# Altium PCB mlx-brd1_091.PcbDoc
Units mil, origin at the board's own origin, x right, y up, seen from the top; angles counter-clockwise.
Board outline 2550 x 1750 mil, 2 copper layers (Top Layer, Bottom Layer), stack 61.756 mil thick; 47 components, 33 nets, 191 pads, 79 vias.
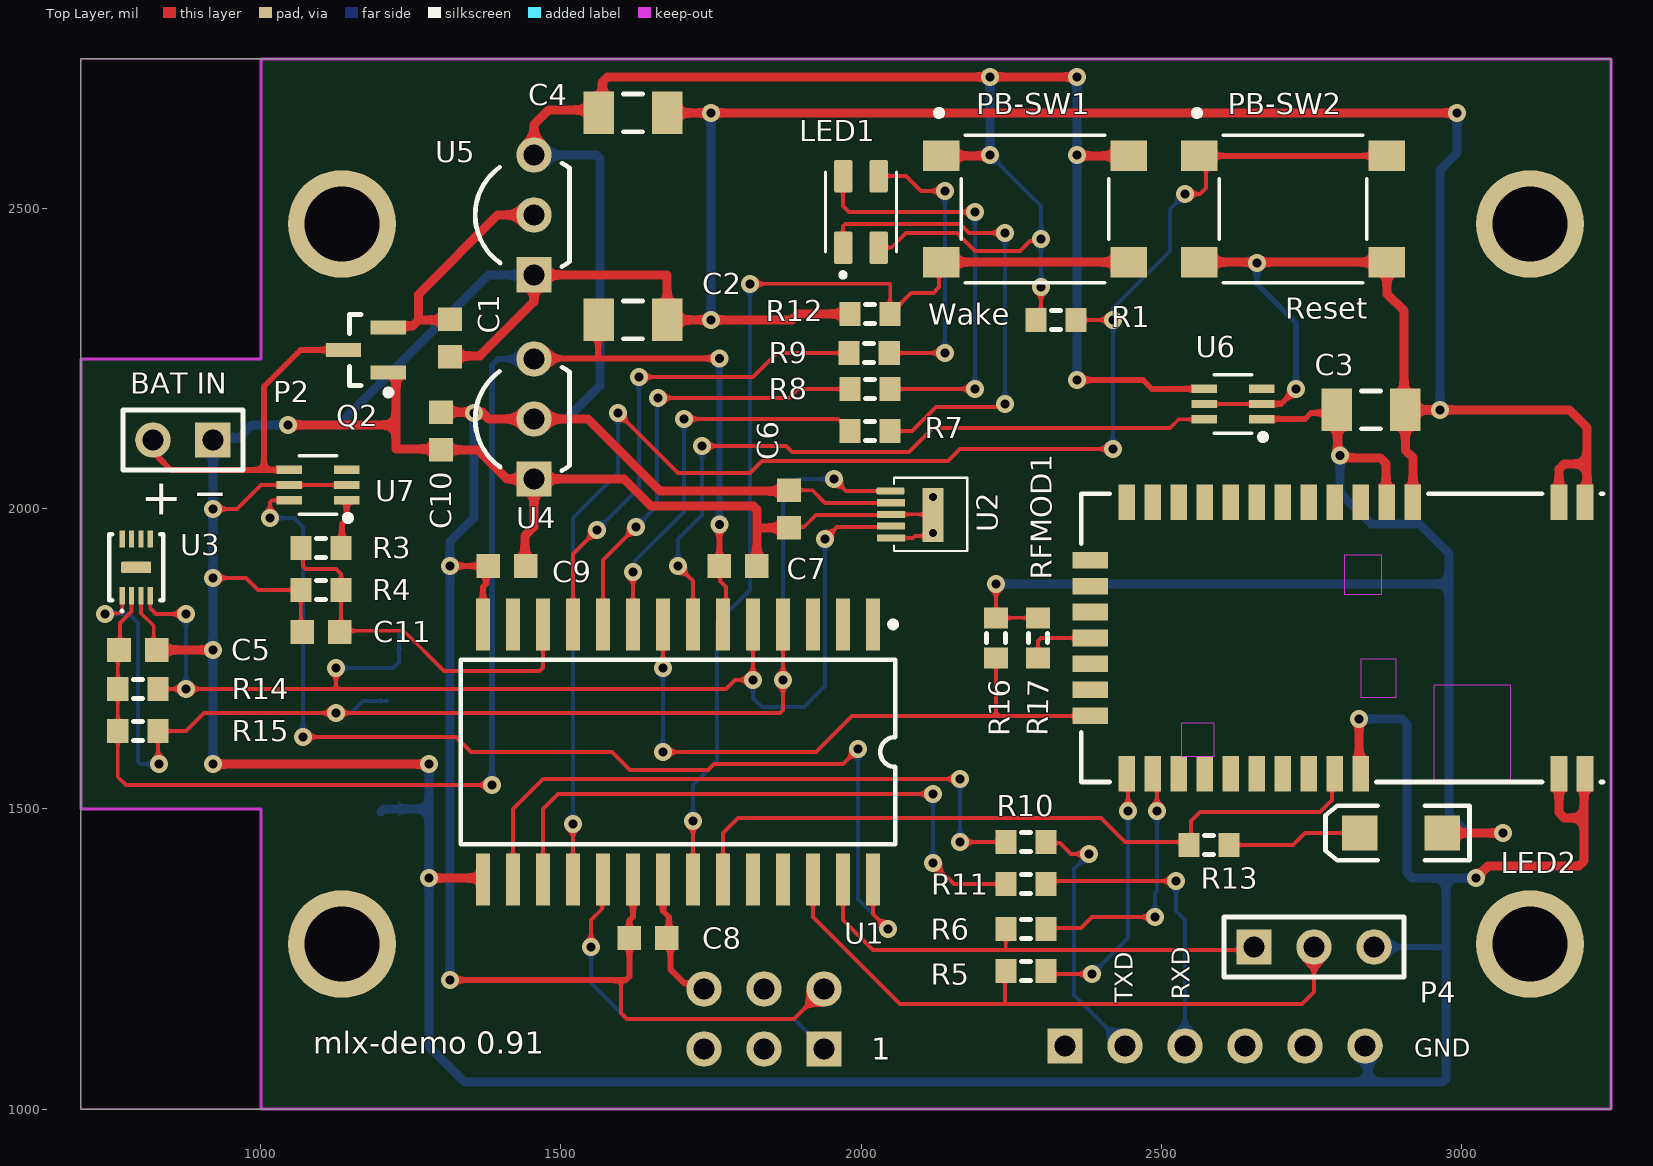
[diagram p0: Top Layer view]
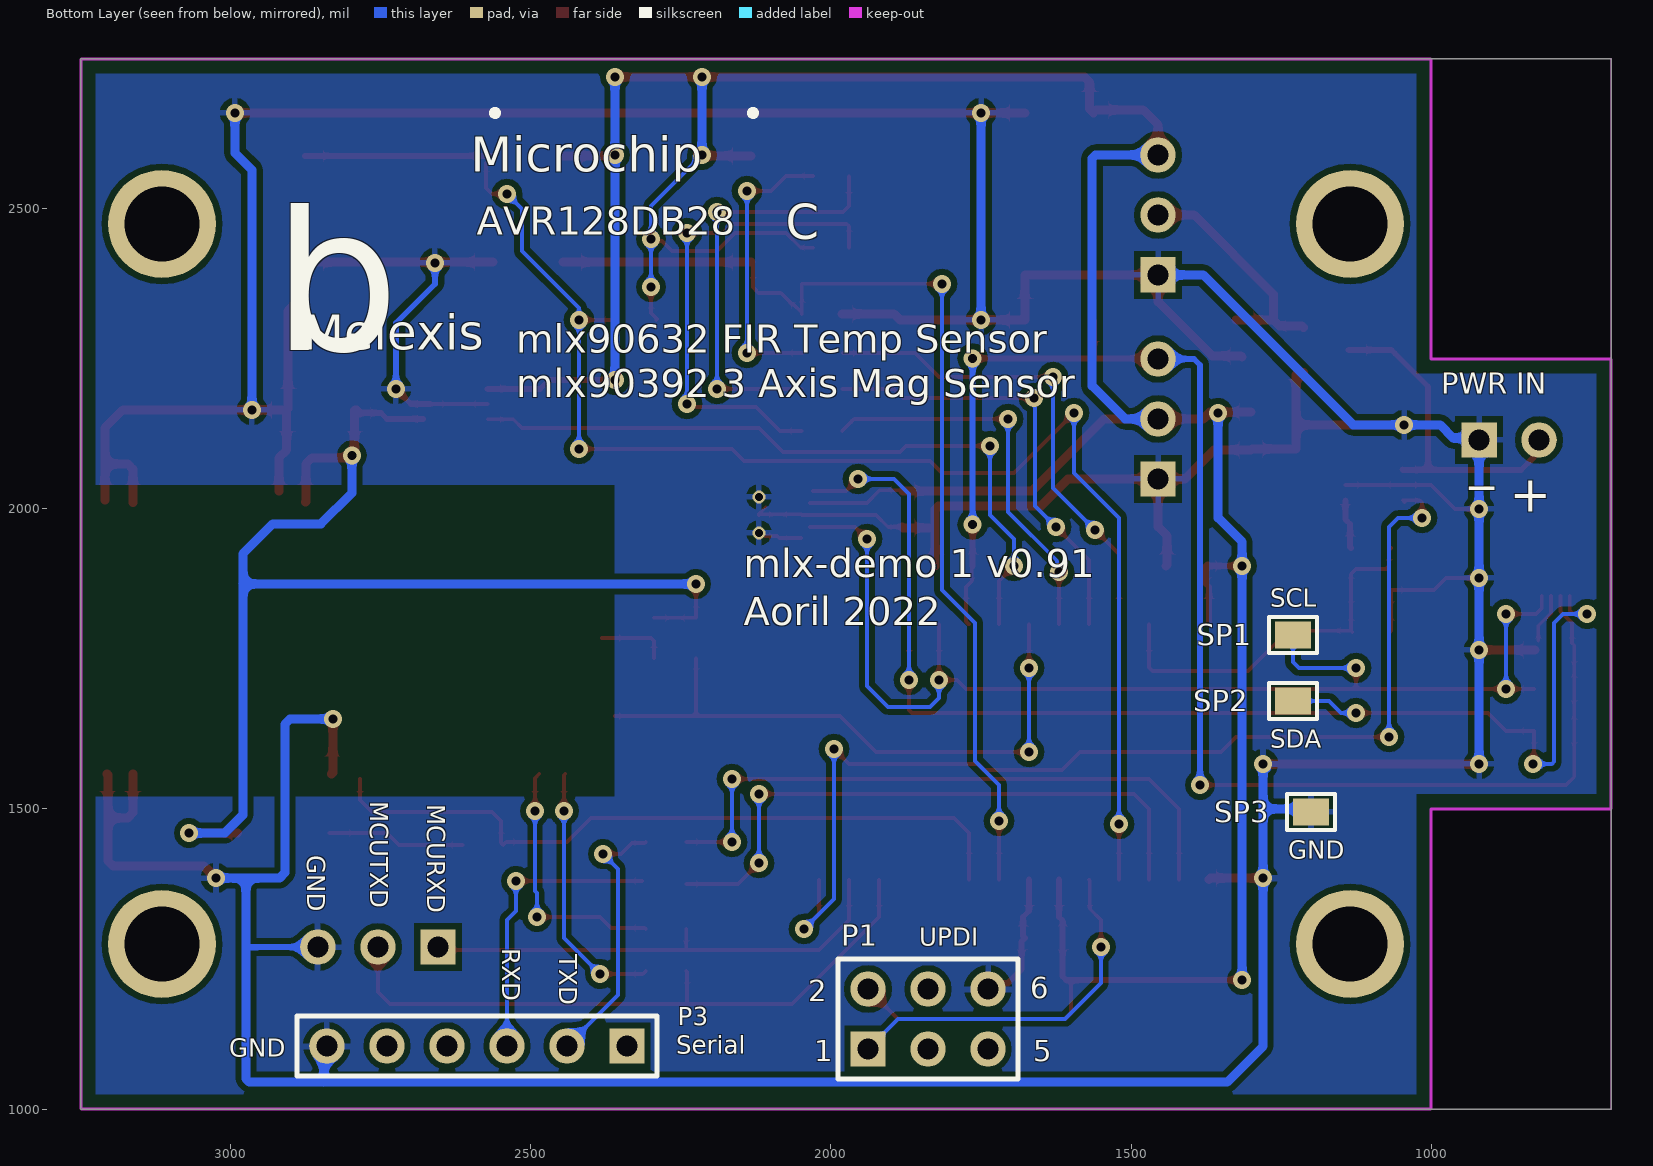
[diagram p1: Bottom Layer view, seen from below]

## Layer stack, top to bottom
Top Solder: solder mask 1, SM-001, Dk 4
Top Layer: signal copper 1.378
Dielectric 1: core 59, Core-043, Dk 4.3
Bottom Layer: signal copper 1.378
Bottom Solder: solder mask 1, SM-001, Dk 4

## Board outline
700,1000 3250,1000 3250,2750 1200,2750 700,2750 700,2250
cut-out: 700,1500 1000,1500 1000,1000 700,1000
cut-out: 700,2750 1000,2750 1000,2250 700,2250
cut-out: 700,2750

## Design rules (kind name [scope] priority, off if disabled: settings)
Clearance [All] p1: gap=6 ignorepadtopadclearanceinfootprint=FALSE except(10: Arc-Fill Arc-Poly Arc-Region Track-Fill Track-Poly Track-Region THPad-Fill THPad-Poly THPad-Region Via-Fill Via-Poly Via-Region Fill-Fill Fill-Poly Fill-Region Poly-Poly Poly-Region Region-Region)
HoleSize [All] p1: absolutevalues=TRUE maxlimit=125 minlimit=1 maxpercent=80.000 minpercent=20.000
MinimumSolderMaskSliver [All] p1: minsoldermaskwidth=0
PolygonConnect [All] p1: connectstyle=Relief reliefconductorwidth=10 reliefentries=4 polygonreliefangle="90 Angle" airgapwidth=10
RoutingVias [All] p1: holewidth=15 width=30 viastyle="Through Hole" minholewidth=15 minwidth=30 maxholewidth=28 maxwidth=50
SilkToSolderMaskClearance [IsPad] p1: minsilkscreentomaskgap=2 clearancetoexposedcopper=TRUE
SolderMaskExpansion [All] p1: expansion=4 istentingtop=FALSE
Width [All] p1: maxlimit=30 minlimit=6 preferedwidth=10 minimp=50.000000 maximp=50.000000 favimp=50.000000
27 further rules are at their usual default settings.

## Components (designator, comment, footprint, x,y, rotation, side; value= is the part's Value field where it differs from the comment)
C1 "100nF" CAPC1608N 1315,2285 r90 top value="CAP CER 0.1UF 50V X7R 0603"
C2 "22uF" CAPC3216N 1620,2315 r180 top value="CAP CER 22UF 10V X5R 1206"
C3 "22uF" CAPC3216N 2850,2165 r180 top value="CAP CER 22UF 10V X5R 1206"
C4 "22uF" CAPC3216N 1620,2660 r180 top value="CAP CER 22UF 10V X5R 1206"
C5 "100nF" CAPC1608N 795,1765 r180 top value="CAP CER 0.1UF 50V X7R 0603"
C6 "100nF" CAPC1608N 1880,2000 r90 top value="CAP CER 0.1UF 50V X7R 0603"
C7 "100nF" CAPC1608N 1795,1905 r0 top value="CAP CER 0.1UF 50V X7R 0603"
C8 "100nF" CAPC1608N 1645,1285 r180 top value="CAP CER 0.1UF 50V X7R 0603"
C9 "100nF" CAPC1608N 1410,1905 r180 top value="CAP CER 0.1UF 50V X7R 0603"
C10 "100nF" CAPC1608N 1300,2130 r90 top value="CAP CER 0.1UF 50V X7R 0603"
C11 "1uF" CAPC1608N 1100,1795 r0 top value="CAP CER 1UF 10V X7R 0603"
LED1 "RGB LED" SOL150P350X210-4N 2000,2495 r90 top value="LED RGB DIFFUSED 4PLCC SMD"
LED2 "Status LED" 3.2X1.6X1.1 2900,1460 r180 top value="LED AMBER CLEAR 1206 SMD"
P1 "UDPI HDR" HDR2X3 1938.33,1100 r180 bottom value=n/a
P2 "Header 2" HDR1X2 920,2115 r180 top value=n/a
P3 "Header 6" HDR1X6 2340,1105 r0 bottom
P4 "Header 3" HDR1X3 2655,1270 r0 top
PB-SW1 "PTS645SM43SMTR92LFS" SWITCH_43SMTR92LFS 2290,2500 r0 top value="SWITCH TACTILE SPST-NO 0.05A 12V"
PB-SW2 "PTS645SM43SMTR92LFS" SWITCH_43SMTR92LFS 2720,2500 r0 top value="SWITCH TACTILE SPST-NO 0.05A 12V"
Q2 "DMP2004K" SOT23-3N 1175,2265 r180 top value="MOSFET P-CH 20V 600MA SOT23-3"
R1 "10k0" RESC1608N 2325,2315 r0 top value="RES 10K OHM 1/8W 5% CF AXIAL"
R3 "10k0" RESC1608N 1100,1935 r0 top value="RES 10K OHM 1/8W 5% CF AXIAL"
R4 "10k0" RESC1608N 1100,1865 r0 top value="RES 10K OHM 1/8W 5% CF AXIAL"
R5 "1k0" RESC1608N 2275,1230 r0 top value="RES 10K OHM 1/8W 5% CF AXIAL"
R6 "1k0" RESC1608N 2275,1300 r0 top value="RES 10K OHM 1/8W 5% CF AXIAL"
R7 "1k0" RESC1608N 2015,2130 r180 top value="RES 10K OHM 1/8W 5% CF AXIAL"
R8 "1k0" RESC1608N 2015,2200 r0 top value="RES 10K OHM 1/8W 5% CF AXIAL"
R9 "1k0" RESC1608N 2013.46,2260 r0 top value="RES 10K OHM 1/8W 5% CF AXIAL"
R10 "Res3" RESC1608N 2275,1445 r0 top value="1k0  1/8W"
R11 "Res3" RESC1608N 2275,1375 r0 top value="1k0  1/8W"
R12 "10k0" RESC1608N 2015,2325 r180 top value="RES 10K OHM 1/8W 5% CF AXIAL"
R13 "1k0" RESC1608N 2580,1440 r180 top value="RES 10K OHM 1/8W 5% CF AXIAL"
R14 "2k2" RESC1608N 795,1700 r180 top value="RES 10K OHM 1/8W 5% CF AXIAL"
R15 "2k2" RESC1608N 795,1630 r180 top value="RES 10K OHM 1/8W 5% CF AXIAL"
R16 "10k0" RESC1608N 2225,1785 r90 top value="RES 10K OHM 1/8W 5% CF AXIAL"
R17 "10k0" RESC1608N 2295,1785 r90 top value="RES 10K OHM 1/8W 5% CF AXIAL"
RFMOD1 "RN4870 BTLE MODULE" AP6-00539 2805,1785 r270 top value="RX TXRX MODULE BLE CHIP SMD"
SP1 "45x60mil solder pad" sp45x60 1230,1790 r180 bottom
SP2 "45x60mil solder pad" sp45x60 1230,1680 r180 bottom
SP3 "45x60mil solder pad" sp45x60 1200,1495 r180 bottom
U1 "AVR128DB28" AVR128DB28_SOIC28 1695,1595 r180 top value="AVR DB Microcontroller"
U2 "MLX90632" MLX90632_FIR_M2 2050,1990 r0 top value="FIR sensor"
U3 "MLX90392" UTDFN8_2.5x2x0.4V2 792.13,1902.76 r0 top value="3D Magnetometer"
U4 "MCP1702 - 1.8V" MC1702-TO92 1455,2150 r0 top value="Linear Voltage Regulator IC Positive Fixed 1 Output 250mA TO-92-3"
U5 "MCP1702 - 3.3V" MC1702-TO92 1455,2490 r0 top value="Linear Voltage Regulator IC Positive Fixed 1 Output 200mA TO-92-3"
U6 "MIC94095YC6" SC-70 2620,2175 r180 top value="Power Switch/Driver 1:1 P-Channel 1.2A SC-70-6"
U7 "MIC94095YC6" SC-70 1095,2040 r180 top value="Power Switch/Driver 1:1 P-Channel 1.2A SC-70-6"

## Footprints (in the part's own frame and the unit in brackets; to place one, negate y for a bottom-side part, rotate by r counter-clockwise, add the part's x,y. Pads: shape width x height; smd on the part's side, far side on the other; paste and mask are expansions set on the pad)
3.2X1.6X1.1 [mm] "SMT LED; 2 Flat Leads"
  rect 1.5x1.5 smd: 1(-1.75,0) 2(1.75,0)
  silkscreen extent -2.9,-1.15 3.2,1.15
AP6-00539 [mm]
  rect 1.5x0.7 smd: 1(-5.742,10.2) 2(-5.742,9.1) 3(-5.75,2.9) 4(-5.75,1.8) 5(-5.75,0.7) 6(-5.75,-0.4) 7(-5.75,-1.5) 8(-5.75,-2.6) 9(-5.75,-3.7) 10(-5.75,-4.8) 11(-5.75,-5.9) 12(-5.75,-7) 13(-5.75,-8.1) 14(-5.75,-9.2) 22(5.75,-9.2) 23(5.75,-8.1) 24(5.75,-7) 25(5.75,-5.9) 26(5.75,-4.8) 27(5.75,-3.7) 28(5.75,-2.6) 29(5.75,-1.5) 30(5.75,-0.4) 31(5.75,0.7) 32(5.75,9.1) 33(5.75,10.2)
  rect 0.7x1.5 smd: 15(-3.3,-10.75) 16(-2.2,-10.75) 17(-1.1,-10.75) 18(0,-10.75) 19(1.1,-10.75) 20(2.2,-10.75) 21(3.3,-10.75)
  Top Layer keep-out region: -3.5,0 -1.85,0 -1.85,1.6 -3.5,1.6
  Top Layer keep-out region: 0.9,0.7 2.5,0.7 2.5,2.2 0.9,2.2
  Top Layer keep-out region: 3.6,-6.9 5,-6.9 5,-5.5 3.6,-5.5
  Top Layer keep-out region: 2,3.8 6,3.8 6,7.05 2,7.05
  silkscreen extent -6.1,-11.12 6.1,10.97, body extent -6,-11 6,11, height 2.4
AVR128DB28_SOIC28 [mm] "Small Outline; 28 Leads; Body Width 8.9 mm; Pitch 1.27 mm"
  rect 0.6x2.2 smd: 1(-8.255,-5.4) 2(-6.985,-5.4) 3(-5.715,-5.4) 4(-4.445,-5.4) 5(-3.175,-5.4) 6(-1.905,-5.4) 7(-0.635,-5.4) 8(0.635,-5.4) 9(1.905,-5.4) 10(3.175,-5.4) 11(4.445,-5.4) 12(5.715,-5.4) 13(6.985,-5.4) 14(8.255,-5.4) 15(8.255,5.4) 16(6.985,5.4) 17(5.715,5.4) 18(4.445,5.4) 19(3.175,5.4) 20(1.905,5.4) 21(0.635,5.4) 22(-0.635,5.4) 23(-1.905,5.4) 24(-3.175,5.4) 25(-4.445,5.4) 26(-5.715,5.4) 27(-6.985,5.4) 28(-8.255,5.4)
  silkscreen extent -9.23,-5.52 9.2,3.9
CAPC1608N [mm] "Chip Capacitor, Body 1.6x0.8mm, IPC Medium Density"
  rect 1x1 smd: 1(-0.8,0) 2(0.8,0)
  body extent -0.87,-0.48 0.87,0.48, height 0.85
CAPC3216N [mm] "Chip Capacitor, Body 3.2x1.6mm, IPC Medium Density"
  rect 1.3x1.8 smd: 1(-1.45,0) 2(1.45,0)
  silkscreen extent -0.4,-0.8 0.4,0.8, body extent -1.7,-0.9 1.7,0.9, height 1.35
HDR1X2 [mm] "Connector; Header; 2 Position"
  rect 1.5x1.5 hole 0.9: 1(0,0)
  round 1.5 hole 0.9: 2(2.54,0)
  silkscreen extent -1.27,-1.27 3.81,1.27
HDR1X3 [mm] "Connector; Header; 3 Position"
  rect 1.5x1.5 hole 0.9: 1(0,0)
  round 1.5 hole 0.9: 2(2.54,0) 3(5.08,0)
  silkscreen extent -1.27,-1.27 6.35,1.27
HDR1X6 [mm] "Connector; Header; 6 Position"
  rect 1.5x1.5 hole 0.9: 1(0,0)
  round 1.5 hole 0.9: 2(2.54,0) 3(5.08,0) 4(7.62,0) 5(10.16,0) 6(12.7,0)
  silkscreen extent -1.27,-1.27 13.97,1.27
HDR2X3 [mm] "Connector; Header; 3x2 Position"
  rect 1.5x1.5 hole 0.9: 1(0,0)
  round 1.5 hole 0.9: 2(0,2.54) 3(2.54,0) 4(2.54,2.54) 5(5.08,0) 6(5.08,2.54)
  silkscreen extent -1.27,-1.27 6.35,3.81
MC1702-TO92 [mm] "TO, Flat Index; 3 In-Line, Axial Leads (Wide Pitch); Body Dia. 4.7mm; Leads 0.56 x 0.51 mm (max)"
  rect 1.5x1.5 hole 0.9: 1(0,-2.54)
  round 1.5 hole 0.9: 2(0,0) 3(0,2.54)
  silkscreen extent -2.49,-2.19 1.51,2.19
MLX90632_FIR_M2 [mm]
  rrect50% 1.2x0.3 smd: 1(-0.025,1.016)
  rect 1.2x0.3 smd: 2(0,0.516) 3(0,0.025) 4(0,-0.475) 5(0,-0.975)
  round 0.55 hole 0.35: 6(1.778,-0.762) 6(1.778,0.762)
  rect 0.889x2.286 smd: 6(1.778,0)
  silkscreen extent 0.13,-1.52 3.23,1.57, body extent 0.18,-1.47 3.17,1.52, height 1.02
RESC1608N [mm] "Chip Resistor, Body 1.6x0.8mm, IPC Medium Density"
  rect 0.9x1 smd: 1(-0.85,0) 2(0.85,0)
  silkscreen extent -0.2,-0.4 0.2,0.4, body extent -0.85,-0.48 0.85,0.48, height 0.6
SC-70 [mil]
  rect 42.5x14 smd paste+0 mask+0: 1(-47.75,25.59) 2(-47.75,0) 3(-47.75,-25.59) 4(47.75,-25.59) 5(47.75,0) 6(47.75,25.59)
  silkscreen extent -55,-49 32,60, body extent -47,-44 47,44, height 43
SOL150P350X210-4N [mm]
  rrect25% 1.39x0.79 smd: 1(-1.515,0.75) 2(-1.515,-0.75) 3(1.515,-0.75) 4(1.515,0.75)
  silkscreen extent -2.77,-1.5 1.7,1.5
SOT23-3N [mm] "SOT23, 3-Leads, Body 2.9x1.3mm, Pitch 0.95mm, Lead Span 2.5mm, IPC Medium Density"
  rect 1.5x0.6 smd: 1(-0.95,0.95) 2(-0.95,-0.95) 3(0.95,0)
  silkscreen extent -1.07,-1.5 0.7,1.92, body extent -0.7,-1.5 0.7,1.5, height 1.1
sp45x60 [mil]
  rect 60x45 smd: 1(0,0)
  silkscreen extent -40,-30 40,30
SWITCH_43SMTR92LFS [mil]
  rect 61x51 smd paste+0 mask+0: 1(-156.5,88.58) 2(156.5,88.58) 3(-156.5,-88.58) 4(156.5,-88.58)
  silkscreen extent -165,-123 123,165, body extent 0,0 10,10, height 10
UTDFN8_2.5x2x0.4V2 [mm] "Soldered, UTDFN8_2.5x2x0.4"
  rect 0.229x0.737 smd mask+0.051: 1(-0.6,-1.2) 2(-0.2,-1.2) 3(0.2,-1.2) 4(0.6,-1.2) 5(0.6,1.2) 6(0.2,1.2) 7(-0.2,1.2) 8(-0.6,1.2)
  rrect25% 1.27x0.5 smd: EXP(0,0)
  silkscreen extent -1.14,-1.9 1.14,1.4, body extent -1,-1.25 1,1.25, height 0.4

## Part data
C1 C5 C6 C7 C8 C9 C10: library part Cap, "Capacitor", Manufacturer=Yageo, MPN=CC0603KPX7R9BB104, Digi-Key PN=311-3567-1-ND
C2 C3 C4: library part Cap, "Capacitor", Manufacturer=Yageo, MPN=CC1206MKX5R6BB226, Digi-Key PN=311-1995-1-ND
C11: library part Cap, "Capacitor", Manufacturer="Taiyo Yuden", MPN=LMK107B7105KA-T, Digi-Key PN=587-1242-1-ND
LED1: library part CLVBA-FKA-CAEDH8BBB7A363, "Red, Green, Blue _RGB_ 622nm Red, 530nm Green, 470nm Blue LED Indication - Discrete 1.9V Red, 3V Green, 3V Blue 4-PLCC", Manufacturer="CreeLED, Inc.", Digi-Key PN=CLVBA-FKA-CAEDH8BBB7A363CT-ND, MPN=CLVBA-FKA-CAEDH8BBB7A363
LED2: library part LED1, "Typical RED GaAs LED", Manufacturer=Inolux, MPN=IN-S126ATA, Digi-Key PN=1830-1091-1-ND
P1: library part "Header 3X2", "Header, 3-Pin, Dual row", Manufacturer=n/a, Digi-Key PN=n/a, MPN=n/a
P2: "Header, 2-Pin", Manufacturer=n/a, Digi-Key PN=n/a, MPN=n/a
P3: "Header, 6-Pin"
P4: "Header, 3-Pin"
PB-SW1 PB-SW2: "No Description Available", Manufacturer=C&K, Digi-Key PN=CKN9112CT-ND, MPN=PTS645SM43SMTR92LFS
Q2: "P-Channel MOSFET", Manufacturer="Diodes Incorporated", MPN=DMP2004K-7, Digi-Key PN=DMP2004KDICT-ND
R1 R3 R4 R5 R6 R7 R8 R9 R12 R13 R14 R15 R16 R17: library part Res3, "Resistor", Manufacturer="Stackpole Electronics Inc", MPN=CF18JT10K0, Digi-Key PN=CF18JT10K0CT-ND
R10 R11: Manufacturer=Stackpole, MPN=CF18JT1K00, Digi-Key PN=CF18JT1K00CT-ND
RFMOD1: "Bluetooth LE Module", Manufacturer="Microchip Technology", MPN=RN4870-V/RM140, Digi-Key PN=150-RN4870-V/RM140-ND
SP1 SP2 SP3: library part sp45x60
U1: "28 SDIP AVR DB microcontroller", Manufacturer="Microchip Technology", MPN=AVR128DB28
U2: library part MLX90632-FIR, Manufacturer=Melexis, MPN=MLX90632-S-LD-DCB-100, Digi-Key PN=n/a
U3: library part MLX90392-mag, Manufacturer=Melexis, MPN=MLX90392ELQ-AAA-010-RE, Digi-Key PN=n/a
U4: library part MCP1702-TO92, Manufacturer="Microchip Technology", MPN=MCP1702-3302E/TO, Digi-Key PN=MCP1702-3302E/TO-ND
U5: library part MCP1702-TO92, Manufacturer="Microchip Technology", MPN=MCP1702-1802E/TO, Digi-Key PN=MCP1702-1802E/TO-ND
U6 U7: Manufacturer="Microchip Technology", MPN=MIC94095YC6-TR, Digi-Key PN=576-3494-1-ND

## Free pads (board coordinates)
  round 180 hole 125: 1(1135,2475) 2(3115,2475) 3(3115,1275) 4(1135,1275)

## Via types
v1: diameter 30, hole 15, Top Layer to Bottom Layer, 79 vias

## Nets (pads, with @x,y where several pads share a name; then routed paths per layer and width w, separated by ;. In a path a pad name is that pad's centre, name@x,y a point inside that pad or via, vN(x,y) a via of type N, cw(c..) or ccw(c..) an arc to the next point about the centre after c; other vN are vias at no path point)
BAT_SMPL: U1.28 U7.6 | length 1850.9
  Top Layer w6: v1(1015,1985) 1015,2010.89 1018.51,2014.41 U7.6 U7.6@1044.18,2011.34 ; v1(1070,1620) 1325,1620 1350,1595 1585,1595 1615,1565 1745,1565 1755,1575 1970,1575 v1(1995,1600) ; U1.28 2020,1325 v1(2045,1300)
  Bottom Layer w6: v1(1015,1985) 1055,1985 1070,1970 v1(1070,1620) ; v1(1995,1600) 1995,1350 v1(2045,1300)
BTLE_PWR: U1.7 U6.6 | length 1188.3
  Top Layer w6: v1(1695,1905) 1720,1880 U1.7 ; v1(1735,2105) 1875,2105 1885,2095 2080,2095 2120,2135 2515,2135 2529.41,2149.41 2558,2149.41 U6.6
  Bottom Layer w6: v1(1695,1905) 1695,1950 1735,1990 v1(1735,2105)
BTLE_RSTn: R16.1 RFMOD1.21 U1.8 | length 1024
  Top Layer w6: v1(1670,1595) 1925,1595 1985,1655 2225,1655 ; v1(1670,1735) U1.8 ; R16.1 2225,1655 ; RFMOD1.21@2360,1655 2225,1655
  Bottom Layer w6: v1(1670,1595) v1(1670,1735)
BTLE_RXD: R5.2 RFMOD1.22 | length 438
  Top Layer w6: R5.2 2313.46,1225 v1(2385,1225) ; RFMOD1.22 2445,1556.42 v1(2445,1497.05)
  Bottom Layer w6: v1(2385,1225) 2445,1285 v1(2445,1497.05)
BTLE_STS: R13.2 RFMOD1.30 U1.23 | length 1209.1
  Top Layer w6: U1.23 1770,1460 1795,1485 2400,1485 2440,1445 2541.54,1445 R13.2 2550,1443.46 2550,1480 2565,1495 2765,1495 2785,1515 RFMOD1.30@2785,1550
BTLE_TXD: R6.2 RFMOD1.23 | length 435.2
  Top Layer w6: R6.2 2310.13,1301.67 2366.67,1301.67 2385,1320 v1(2490,1320) ; RFMOD1.23 2493.26,1551.46 v1(2493.26,1496.74) v1@2491.53,1498.47
  Bottom Layer w6: v1(2490,1320) 2490,1360 2493.26,1363.26 v1(2493.26,1496.74)
DBG_RXD: R11.1 U1.17 | length 1025.5
  Top Layer w6: U1.17 1470,1500 1495,1525 v1@2116.49,1525 ; v1(2120,1410) 2155,1375 R11.1
  Bottom Layer w6: v1(2120,1410) v1(2120,1525)
DBG_TXD: R10.1 U1.16 | length 1064.8
  Top Layer w6: U1.16 1420,1500 1470,1550 v1(2165,1550) ; v1(2165,1445) R10.1
  Bottom Layer w6: v1(2165,1445) v1(2165,1550)
GND: C1.1 C2.1 C3.1 C4.1 C5.1 C6.1 C7.2 C8.1 C9.1 C10.1 C11.1 P1.6 P2.1 P3.6 P4.3 PB-SW2.3 PB-SW2.4 Q2.1 R4.1 R12.2 RFMOD1.1 RFMOD1.2 RFMOD1.3 RFMOD1.31 RFMOD1.32 RFMOD1.33 SP3.1 U1.15 U1.21 U2.3 U2.5 U2.6 U3.3 U4.1 U5.1 U6.2 U6.5 U7.2 U7.5 | length 12514.1
  Top Layer w6: U3.3 800,1826.39 821.17,1805.21 C5.1@821.17,1780.32 ; v1(920,1885) 975,1885 995,1865 R4.1 1066.54,1796.97 C11.1 ; v1(920,2000) 960,2000 1000,2040 U7.5 U7.2 ; C6.1@1881.67,1970.17 1905.17,1970.17 1925,1990 2049,1990 U2.3 2119,1991 2120,1990 2120,1991.96 2113.04,1998.92 U2.6@2108.82,2003.14 ; U2.5 2086.49,1951.63 2089.86,1955 U2.6@2110,1955 ; U6.5 U6.2
  Top Layer w10: U1.21 U1.21 1670.05,1329.95 1680,1320 1680,1288.5 C8.1 1682.15,1279.34 1682.15,1232.85 1705.61,1209.39 1728.94,1209.39 P1.6 ; U6.2 2700,2175 v1(2725,2200)
  Top Layer w15: C5.1 v1(920,1765) ; v1@925.86,1574.64 v1@1269.14,1574.64 ; v1(1045,2140) 1225,2140 ; Q2.1 1220.69,2227.6 1225,2223.29 1225,2140 ; v1(1280,1385) 1367.4,1385 U1.15 ; C1.1 1316.5,2255 1365,2255 1455,2345 U5.1 1677.09,2390 1677.09,2320 C2.1@1682.09,2315 ; C9.1 1440,1906.5 1440,1955 1455,1970 U4.1 ; C2.1 C2.1@1682.09,2315 ; C4.1 v1(1750,2660) v1(2993.3,2660) ; C7.2 1826.5,1970 ; C6.1@1881.67,1970.17 C6.1 1827.99,1968.5 1826.5,1970 ; R12.2 1895,2325 1885,2315 C2.1@1682.09,2315 ; PB-SW2.3 PB-SW2.4 2876.5,2358.5 2905,2330 2905,2167.09 C3.1 ; v1(2830,1650) 2830,1561.18 RFMOD1.31 ; RFMOD1.3@2920,2030 2920,2085 2907.09,2097.91 C3.1 ; v1(3025,1385) 3045,1405 3196.21,1405 3205,1413.79 3205,1485 ; RFMOD1.32 3163.27,1493.79 3172.06,1485 3205,1485 ; RFMOD1.2 3163.27,2066.21 3172.06,2075 3210,2075 ; RFMOD1.33 3205,1557.04 3205,1485 ; RFMOD1.1@3210,2015 3210,2075 ; 1225,2140 1225,2100 1298.5,2100 C10.1 1361.5,2098.5 1410,2050 U4.1 ; U4.1 1605,2050 1650,2005 1820.64,2005 1826.5,1999.14 1826.5,1970 ; C3.1 3163.27,2165 3165,2165 3180,2165 3210,2135 3210,2075
  Bottom Layer w10: v1(2660,2410) 2660,2375 2725,2310 v1(2725,2200) ; P4.3 2975,1270
  Bottom Layer w15: v1@920,1580.5 v1(920,1765) v1(920,1885) v1(920,2000) P2.1 923.24,2118.24 963.24,2118.24 985,2140 v1(1045,2140) 1130,2140 1380,2390 U5.1 ; SP3.1 1205,1500 1280,1500 ; v1(1280,1575) 1280,1573.08 1274.57,1567.65 1280,1562.23 1280,1500 ; v1(1750,2315) v1(1750,2660) ; v1(2830,1650) 2901.21,1650 2910,1641.21 2910,1393.79 2918.79,1385 2975,1385 ; P3.6 2845,1100 2845,1045 ; v1(2965,2165) 2965,2565 2993.3,2593.3 v1(2993.3,2660) ; v1(3025,1385) 2975,1385 ; 1280,1500 v1(1280,1385) 1280,1105 1340,1045 2845,1045 ; 2845,1045 2969.14,1045 2975,1050.86 2975,1270 2975,1385
  other v1: 920,1575
LED_BLUE: R9.1 U1.11 | length 824.5
  Top Layer w6: U1.11 1520,1925 v1(1560,1965) ; v1(1630,2220) 1820,2220 1860,2260 R9.1
  Bottom Layer w6: v1(1560,1965) 1630,2035 v1(1630,2220)
LED_GREEN: R8.1 U1.10 | length 753.9
  Top Layer w6: U1.10 1570,1915 v1(1625,1970) ; v1(1661.99,2185) 1880,2185 1895,2200 R8.1
  Bottom Layer w6: v1(1625,1970) 1660,2005 1660,2169.49 1672.24,2181.73 1668.97,2185 v1(1661.99,2185)
LED_RED: R7.2 U1.9 | length 662.4
  Top Layer w6: U1.9 v1(1620,1895) ; v1(1705,2150) 1961.54,2150 R7.2
  Bottom Layer w6: v1(1620,1895) 1623.47,1898.47 1623.47,1913.47 1705,1995 v1(1705,2150)
MCU_RXD: P4.1 R6.1 U1.27 | length 810.8
  Top Layer w6: U1.27 1970,1315 2020,1265 2240,1265 ; R6.1 2241.54,1266.54 2240,1265 ; P4.1 2650,1265 2240,1265
MCU_TXD: P4.2 R5.1 U1.26 | length 1097.8
  Top Layer w6: U1.26 1920,1320 2065,1175 2243.51,1175 ; R5.1 2240,1228.46 2240,1178.51 2243.51,1175 ; P4.2 2755,1195 2735,1175 2243.51,1175
NetC1_2: C1.2 Q2.2 U5.2 | length 407.7
  Top Layer w15: Q2.2 1215.19,2305.19 1252.77,2305.19 1262.58,2315 ; C1.2@1325,2315 1262.58,2315 ; U5.2 1395,2490 1262.58,2357.58 1262.58,2315
NetLED1_1: LED1.1 R7.1 | length 809.2
  Top Layer w6: LED1.1 1970,2435.83 1970,2471.49 1973.51,2475 2165,2475 2180,2460 v1(2240,2460) ; R7.1 2085,2130 2125,2170 2224.49,2170 2224.89,2170.41 2235.41,2170.41 v1(2240,2175)
  Bottom Layer w6: v1(2240,2175) v1(2240,2460)
NetLED1_3: LED1.3 R9.2 | length 484
  Top Layer w6: LED1.3 2029.88,2555 2075,2555 2100,2530 v1(2140,2530) ; R9.2 v1(2140,2260)
  Bottom Layer w6: v1(2140,2260) v1(2140,2530)
NetLED1_4: LED1.4 R8.2 | length 710.5
  Top Layer w6: LED1.4 1970,2554.17 1970,2505 1980,2495 v1(2190,2495) ; R8.2 v1(2190,2200)
  Bottom Layer w6: v1(2190,2200) v1(2190,2495)
NetLED2_2: LED2.2 R13.1 | length 230.9
  Top Layer w6: R13.1 2720,1440 2740,1460 LED2.2 LED2.2@2836.1,1460
NetR3_2: R3.2 U7.1 | length 83.3
  Top Layer w10: R3.2 1135,1936.54 1135,1975 1142.75,1982.75 U7.1
NetR17_1: R17.1 RFMOD1.18 | length 117.3
  Top Layer w6: R17.1 2295,1780 2300,1785 RFMOD1.18
RSTn: PB-SW2.1 PB-SW2.2 R1.2 U1.18 | length 2638.4
  Top Layer w6: U1.18 v1(1520,1475) ; v1(1595,2160) 1695,2060 1815,2060 1835,2080 2145,2080 2165,2100 v1(2420,2100) ; R1.2 v1(2420,2315) ; v1(2540,2525) 2565,2525 2575,2535 2575,2577.09 PB-SW2.1
  Top Layer w10: PB-SW2.1 PB-SW2.2
  Bottom Layer w6: v1(1520,1475) 1520,1985 1595,2060 v1(1595,2160) ; v1(2420,2100) v1(2420,2315) 2420,2335 2515,2430 2515,2500 v1(2540,2525)
RXD_R: P3.3 R11.2 | length 491.2
  Top Layer w6: R11.2@2315,1380 v1(2525,1380)
  Bottom Layer w6: v1(2525,1380) 2525,1330 2540,1315 P3.3
SCL_1V8: R14.1 SP1.1 U1.5 U2.4 U3.4 | length 2007.8
  Top Layer w6: U3.4 815.75,1834.25 825,1825 v1(875,1825) ; R14.1 v1(875,1700) 1125,1700 ; v1(1125,1735) 1125,1700 ; U1.5 v1(1820,1715) 1790,1715 1775,1700 1125,1700 ; v1(1940,1950) 1960,1970 U2.4@2035,1970
  Bottom Layer w6: v1(875,1700) v1(875,1825) ; v1(1125,1735) 1220,1735 1230,1745 SP1.1 ; v1(1820,1715) 1820,1685 1835,1670 1905,1670 1940,1705 v1(1940,1950)
SDA_1V8: R15.1 SP2.1 U1.4 U2.1 U3.1 | length 2221.2
  Top Layer w6: v1(740,1825) 740.99,1825.99 764.01,1825.99 768.5,1830.47 U3.1 ; v1(830,1575) 828.46,1576.54 R15.1 875,1630 905,1660 v1(1125,1660) 1865,1660 1870,1665 v1(1870,1715) U1.4 ; v1(1955,2050) 1975,2030 U2.1@2030,2030
  Bottom Layer w6: v1(740,1825) 780,1825 795,1810 795,1578.51 798.51,1575 v1(830,1575) ; v1(1125,1660) 1150,1660 1170,1680 SP2.1@1210,1680 ; v1(1870,1715) 1870,2025 1895,2050 v1(1955,2050)
TXD_R: P3.2 R10.2 | length 445.4
  Top Layer w6: R10.2 2310.13,1443.33 2331.67,1443.33 2350,1425 v1(2380,1425)
  Bottom Layer w6: v1(2380,1425) 2355,1400 2355,1190 P3.2
UDPI: P1.1 U1.19 | length 614.6
  Top Layer w6: v1(1550,1270) 1550,1315 1568.61,1333.61 1568.61,1381.01 U1.19
  Bottom Layer w6: v1(1550,1270) 1550,1210 1610,1150 1888.33,1150 P1.1
VBATT: C11.2 R3.1 R4.2 U1.12 | length 636.3
  Top Layer w6: R3.1 1070,1931.54 1070,1905 1075,1900 1125,1900 1133.46,1891.54 R4.2 C11.2@1133.46,1796.97 ; C11.2 C11.2@1133.46,1796.97 ; U1.12 1470,1735.86 1464.14,1730 1305,1730 1238.03,1796.97 C11.2@1133.46,1796.97
VCC_1V8: C2.2 C5.2 C7.1 R14.2 R15.2 U1.6 U3.2 U4.3 | length 2535.9
  Top Layer w6: U3.2 784.25,1829.25 765,1810 765,1776.5 761.54,1773.03 R14.2 R15.2 761.54,1553.46 775,1540 v1(1385,1540) ; C7.1@1765.17,1903.33 1765.17,1879.83 1775,1870 1775,1812.6 U1.6
  Top Layer w10: U4.3 1456.04,2251.04 v1(1763.96,2251.04) ; 1561.87,2256.9 1561.87,2313.96 C2.2 ; C7.1@1763.96,1904.55 v1(1763.96,1974)
  Bottom Layer w10: v1@1385,1535 v1(1385,1540) 1385,2240 1395,2250 U4.3 ; v1(1763.96,1974) v1(1763.96,2251.04)
VCC_3V3: C4.2 C6.2 C8.2 C9.2 C10.2 LED1.2 P1.2 PB-SW1.1 PB-SW1.2 R1.1 U1.14 U1.20 U2.2 U4.2 U5.3 U6.4 | length 6086.8
  Top Layer w6: 1600,1215 1600,1160 1610,1150 1888.33,1150 P1.2 ; C6.2 1918.5,2031.5 1940,2010 U2.2@2035,2010 ; LED1.2 2029.74,2435.56 2050.56,2435.56 2075,2460 2160,2460 2190,2430 2265,2430 2281.53,2446.53 2296.53,2446.53 v1(2300,2450) ; R1.1 2290,2316.54 2300,2326.54 v1(2300,2370)
  Top Layer w10: v1(1315,1215) 1600,1215 1607.97,1215 1613.83,1220.86 1613.83,1313.83 1620,1320 U1.20 ; v1(1315,1905) C9.2@1371.5,1905 ; U1.14 1370,1870 1375,1875 C9.2@1375,1901.5 ; v1(2360,2215) 2470,2215 2485,2200 U6.4@2572.25,2200
  Top Layer w15: C10.2 1368.5,2161.5 1380,2150 U4.2 1545,2150 1665.17,2029.83 C6.2@1880,2029.83 ; C9.2@1371.5,1905 C9.2@1375,1901.5 ; U5.3 1455,2640 1480,2665 1557.91,2665 C4.2 1569.15,2666.23 1569.15,2711.21 1577.93,2720 v1(2215,2720) v1(2360,2720) ; PB-SW1.1 v1@2220,2588.58 ; v1@2360,2588.58 PB-SW1.2
  Bottom Layer w6: v1(2215,2590) 2300,2505 v1(2300,2450) v1(2300,2370)
  Bottom Layer w15: v1(1315,1215) v1(1315,1905) 1315,1945 1355,1985 v1(1355,2160) ; U4.2 1510,2150 1565,2205 1565,2584.14 1559.14,2590 U5.3 ; v1(2215,2590) v1(2215,2720) ; v1(2360,2215) v1(2360,2590) v1(2360,2720)
VCC_BTLE: C3.2 LED2.1 R16.2 R17.2 RFMOD1.4 U6.1 | length 2127.9
  Top Layer w6: v1(2225,1875) R16.2 R17.2
  Top Layer w10: U6.1@2680,2150 2740,2150 2750,2160 C3.2@2785.83,2160
  Top Layer w15: C3.2@2785.83,2160 C3.2@2790.83,2165 ; C3.2 2794.15,2163.77 2794.15,2093.79 v1(2798.54,2089.39) 2802.93,2085 2865,2085 2875,2075 2875,2012.24 RFMOD1.4 ; LED2.1@2988.9,1460 v1(3070,1460)
  Bottom Layer w15: v1(2225,1875) 2980,1875 ; v1(2798.54,2089.39) 2798.54,2026.46 2850,1975 2930,1975 2980,1925 2980,1875 ; v1(3070,1460) 3010,1460 2980,1490 2980,1875
VIN: P2.2 Q2.3 U7.4 | length 556.9
  Top Layer w10: P2.2 829.39,2105.61 829.39,2085.61 850,2065 1005,2065 ; U7.4 1046.66,2065 1005,2065 ; Q2.3 1065.86,2265 1060,2259.14 1005,2204.14 1005,2065
WAKE: PB-SW1.3 PB-SW1.4 R12.1 U1.22 | length 1771.6
  Top Layer w6: U1.22 v1(1720,1480) ; v1(1815,2375) v1(1815,2375) 2048.46,2375.05 R12.1@2048.46,2326.97 ; R12.1 R12.1@2048.46,2326.97 ; PB-SW1.3 2130,2407.91 2130,2370 2125,2365 2125,2363.51 2121.49,2360 2083.46,2360 2065.15,2341.69 2063.18,2341.69 R12.1@2048.46,2326.97
  Top Layer w15: PB-SW1.3 PB-SW1.4
  Bottom Layer w6: v1(1720,1480) 1720,1540 1760,1580 1760,1810 1815,1865 v1(1815,2375)
pads on no net: P1.3 P1.4 P1.5 P3.1 P3.4 P3.5 RFMOD1.5 RFMOD1.6 RFMOD1.7 RFMOD1.8 RFMOD1.9 RFMOD1.10 RFMOD1.11 RFMOD1.12 RFMOD1.13 RFMOD1.14 RFMOD1.15 RFMOD1.16 RFMOD1.17 RFMOD1.19 RFMOD1.20 RFMOD1.24 RFMOD1.25 RFMOD1.26 RFMOD1.27 RFMOD1.28 RFMOD1.29 U1.1 U1.2 U1.3 U1.13 U1.24 U1.25 U3.5 U3.6 U3.7 U3.8 U3.EXP U6.3 U7.3

## Polygon pours and split planes (outlines as drawn)
GND on Bottom Layer "GND_L02_P000" (solid, pour order 0): 725,2225 1025,2225 1025,2725 3225,2725 3225,1025 1025,1025 1025,1525 725,1525

## Keep-outs
Keep-Out Layer:
  lines w5: 700,1500 1000,1500 1000,1000 3250,1000 3250,2750 1000,2750 1000,2250 700,2250 700,1500

## Other copper
Bottom Layer:
  pour cut-out: 2360,2040 2360,1520 3240,1520 3240,2040

## Silkscreen, mask and mechanical layers (free items; w line width, h text height)
Top Overlay:
  text "Reset" at 2707,2317 h35
  text "Wake" at 2112,2307 h35
  text "BAT IN" at 782,2192 h35
  text "_" at 895,2040 h60
  text "+" at 800,1990 h60
  text "RXD" at 2548,1182 h30 r90
  text "TXD" at 2453,1177 h30 r90
  text "mlx-demo 0.91" at 1087,1092 h37
  text "GND" at 2922,1087 h30
  text "1" at 2017,1082 h37
Bottom Overlay:
  text "Microchip" at 2600,2542.76 h100
  text "AVR128DB28" at 2590,2440.89 h80
  text "C" at 2075,2430 h100
  text "Melexis" at 2880,2246.02 h100
  text "mlx90632 FIR Temp Sensor" at 2524.93,2244.21 h80
  text "PWR IN" at 983,2192 h35
  text "b" at 2930,2175 h472.44
  text "mlx90392 3 Axis Mag Sensor" at 2524.93,2170.02 h80
  text "_" at 895,2050 h60
  text "+" at 800,1995 h60
  text "SCL" at 1268,1837 h30
  text "mlx-demo 1 v0.91 / Aoril 2022" at 2145,1790 h80
  text "SDA" at 1268,1602 h30
  text "MCUTXD" at 2768,1513 h30 r90
  text "MCURXD" at 2673,1508 h30 r90
  text "GND" at 2873,1423 h30 r90
  text "GND" at 1238,1417 h30
  text "UPDI" at 1853,1272 h30
  text "RXD" at 2548,1268 h30 r90
  text "TXD" at 2453,1258 h30 r90
  text "Serial" at 2258,1092 h30
  text "GND" at 3003,1087 h30

## Dimensions
1135,2475 to 3115,2475 on Mechanical 2
1135,2475 to 1135,1275 on Mechanical 2
1000,2750 to 1000,1000 on Mechanical 2
700,2250 to 3250,2750 on Mechanical 2

## Text inside footprints (layer, text, board x,y; h text height)
P1: Bottom Overlay "6" at 1668.33,1185 h35; Bottom Overlay "5" at 1663.33,1080 h35; Bottom Overlay "2" at 2038.33,1180 h35; Bottom Overlay "1" at 2028.33,1080 h35